# Altium PCB powerhub.PcbDoc (part 1 of 2)
Units mil, origin at the board's own origin, x right, y up, seen from the top; angles counter-clockwise.
Board outline 2155 x 2355 mil, 2 copper layers (Top Layer, Bottom Layer); 40 components, 18 nets, 144 pads, 26 vias.
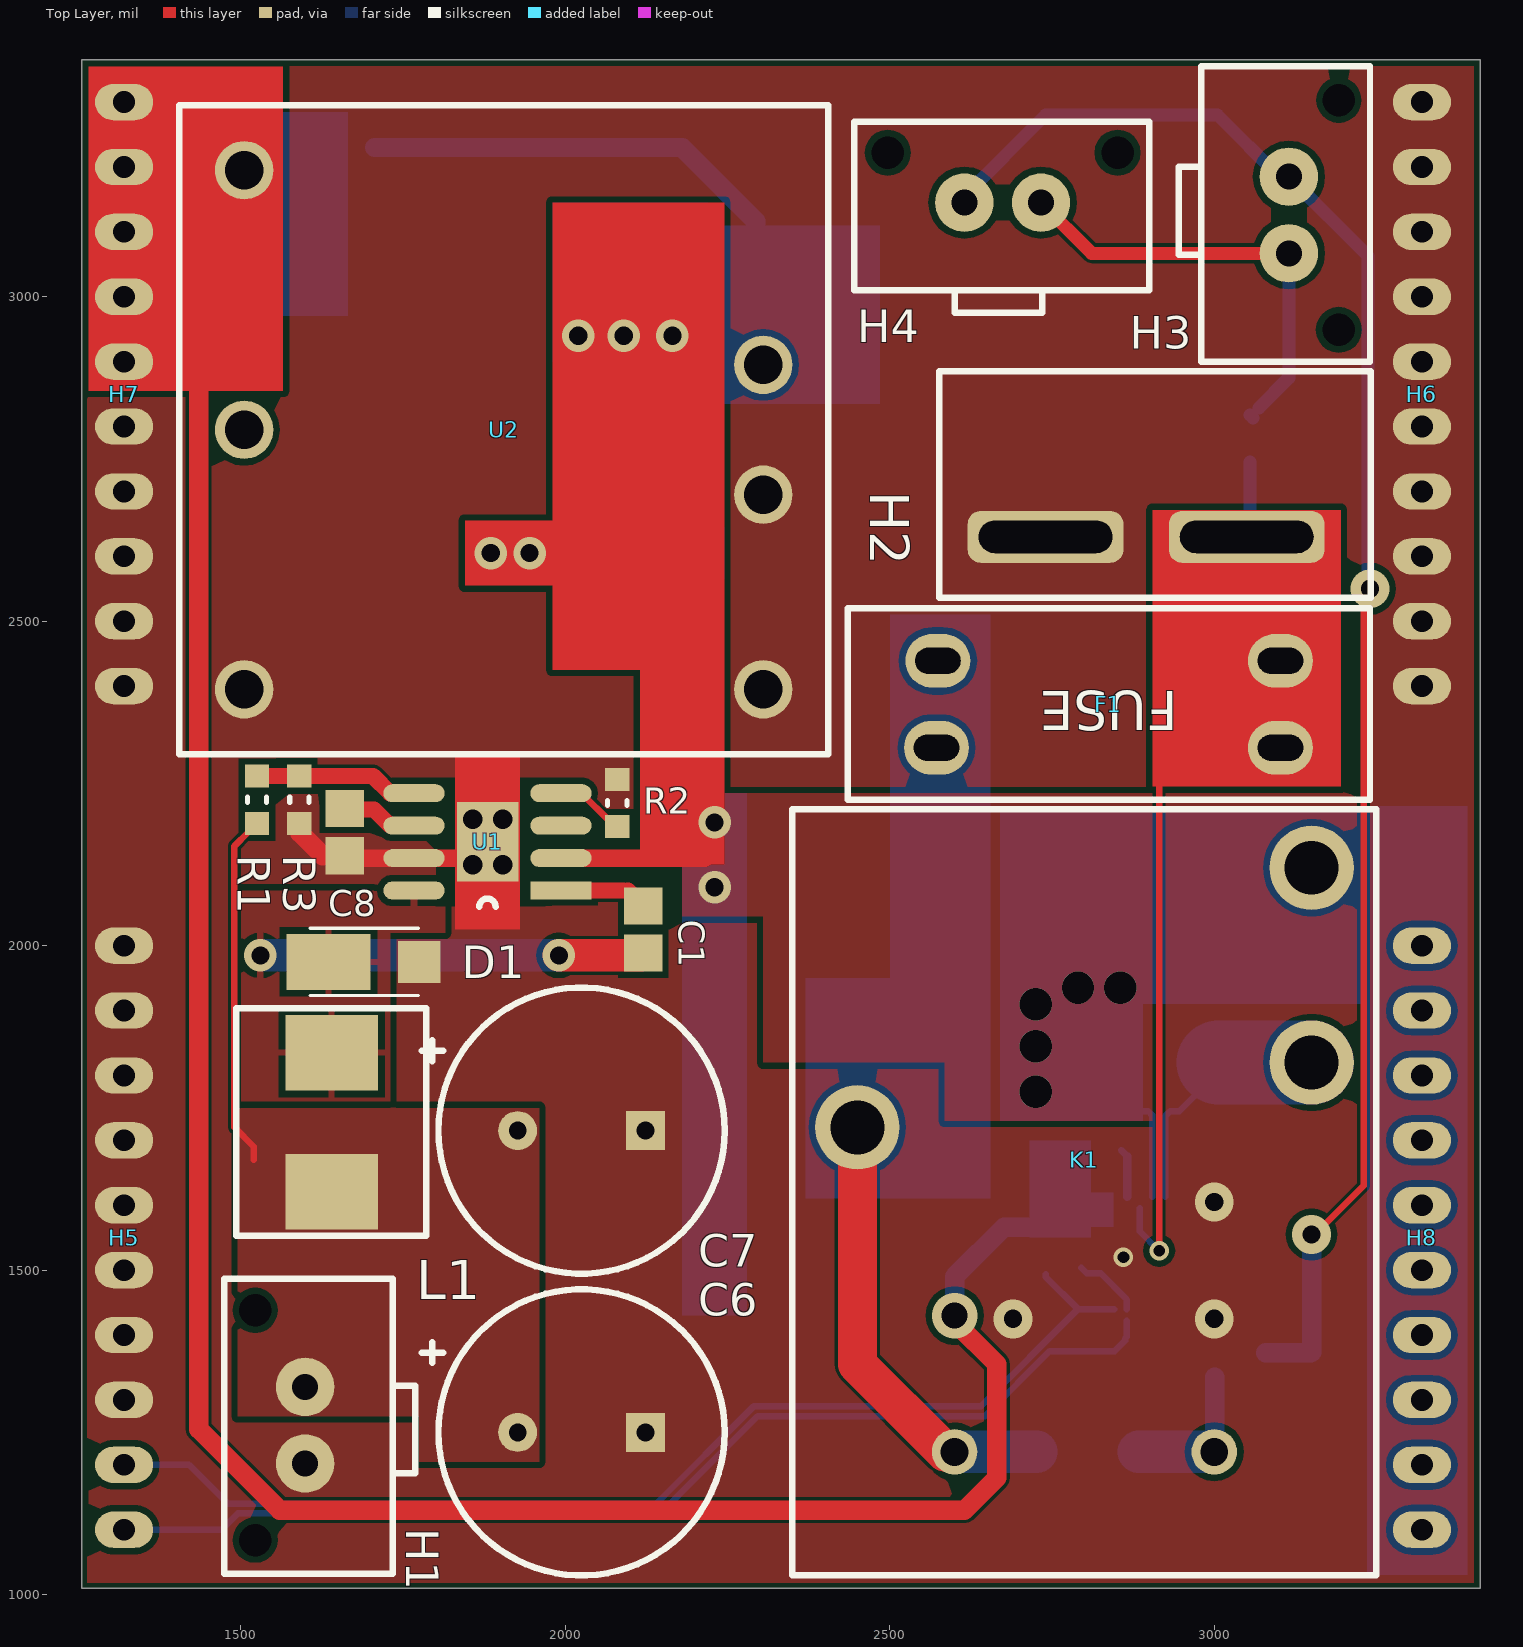
[diagram p0: Top Layer view]
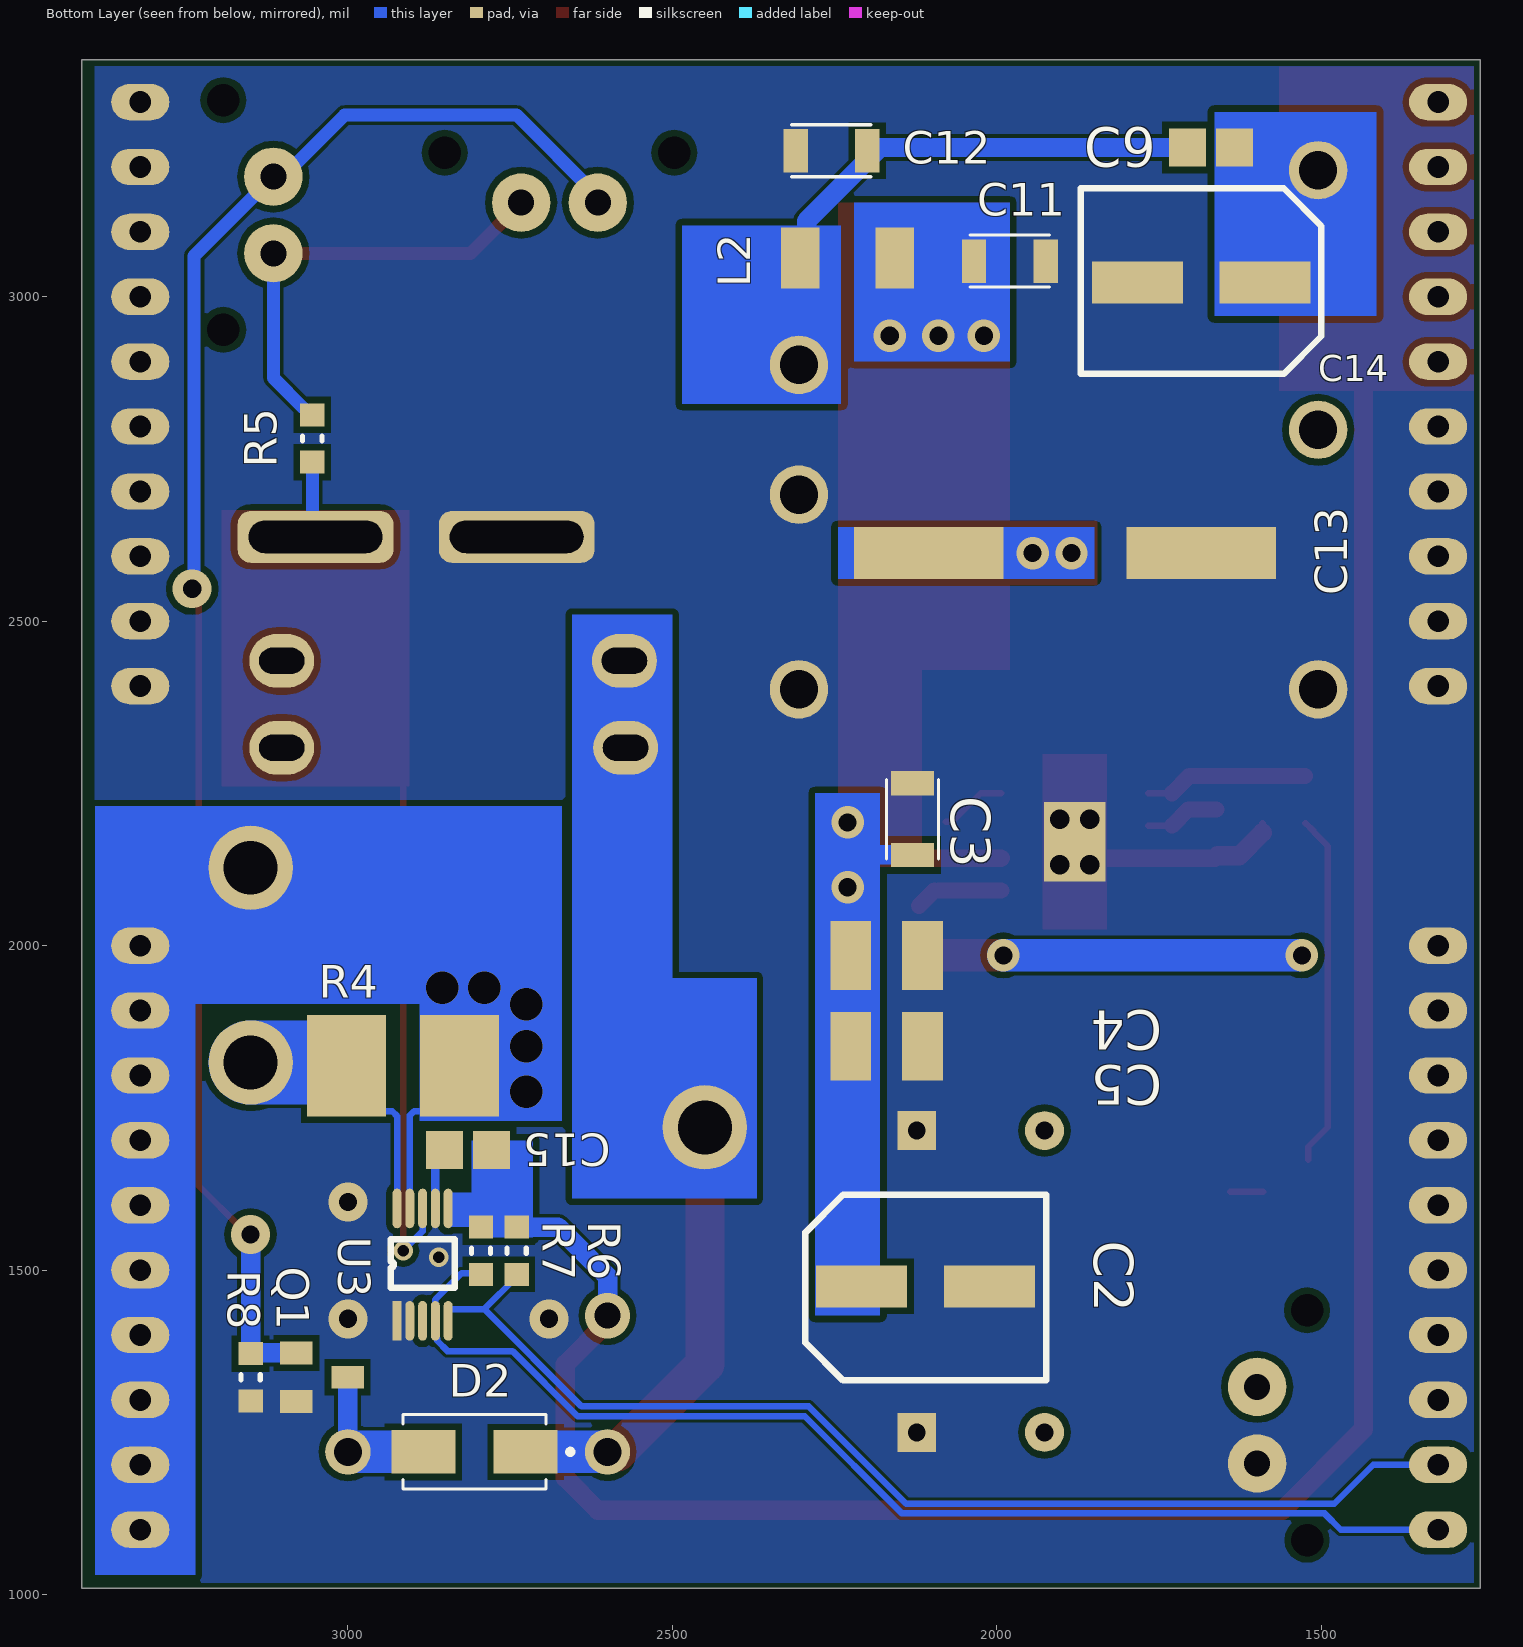
[diagram p1: Bottom Layer view, seen from below]
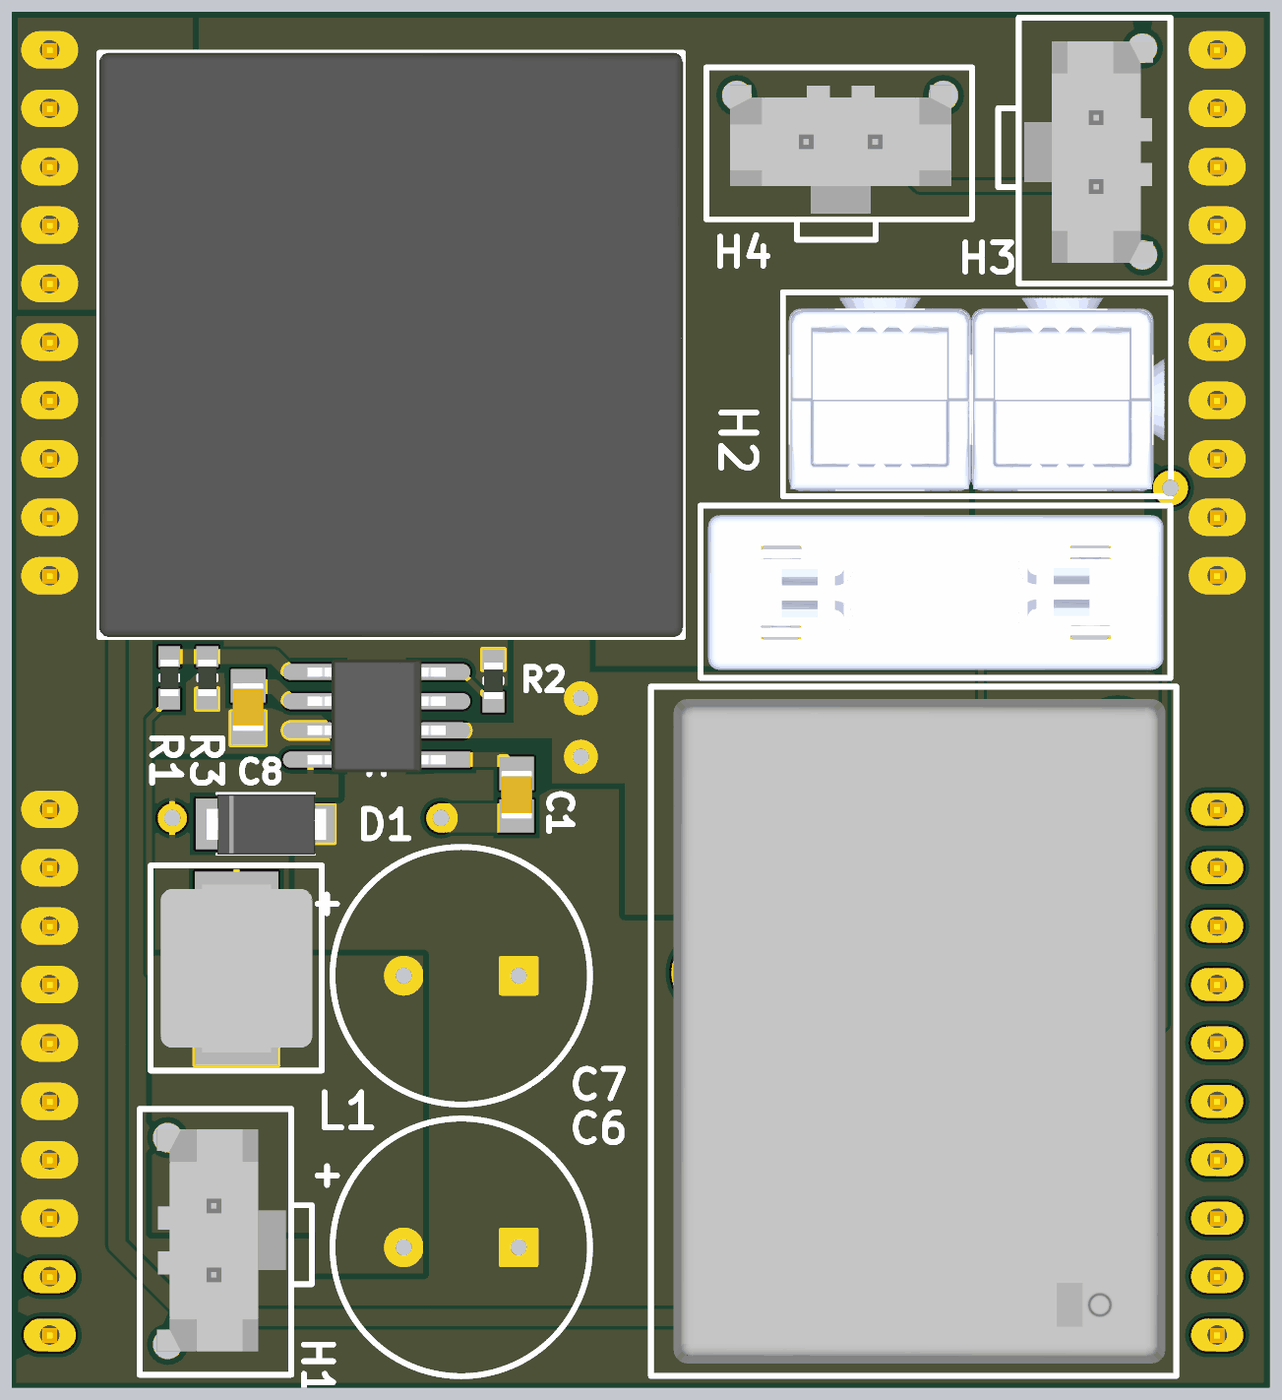
[diagram p2: 3D render of the assembled board from above, using the file's embedded part models]
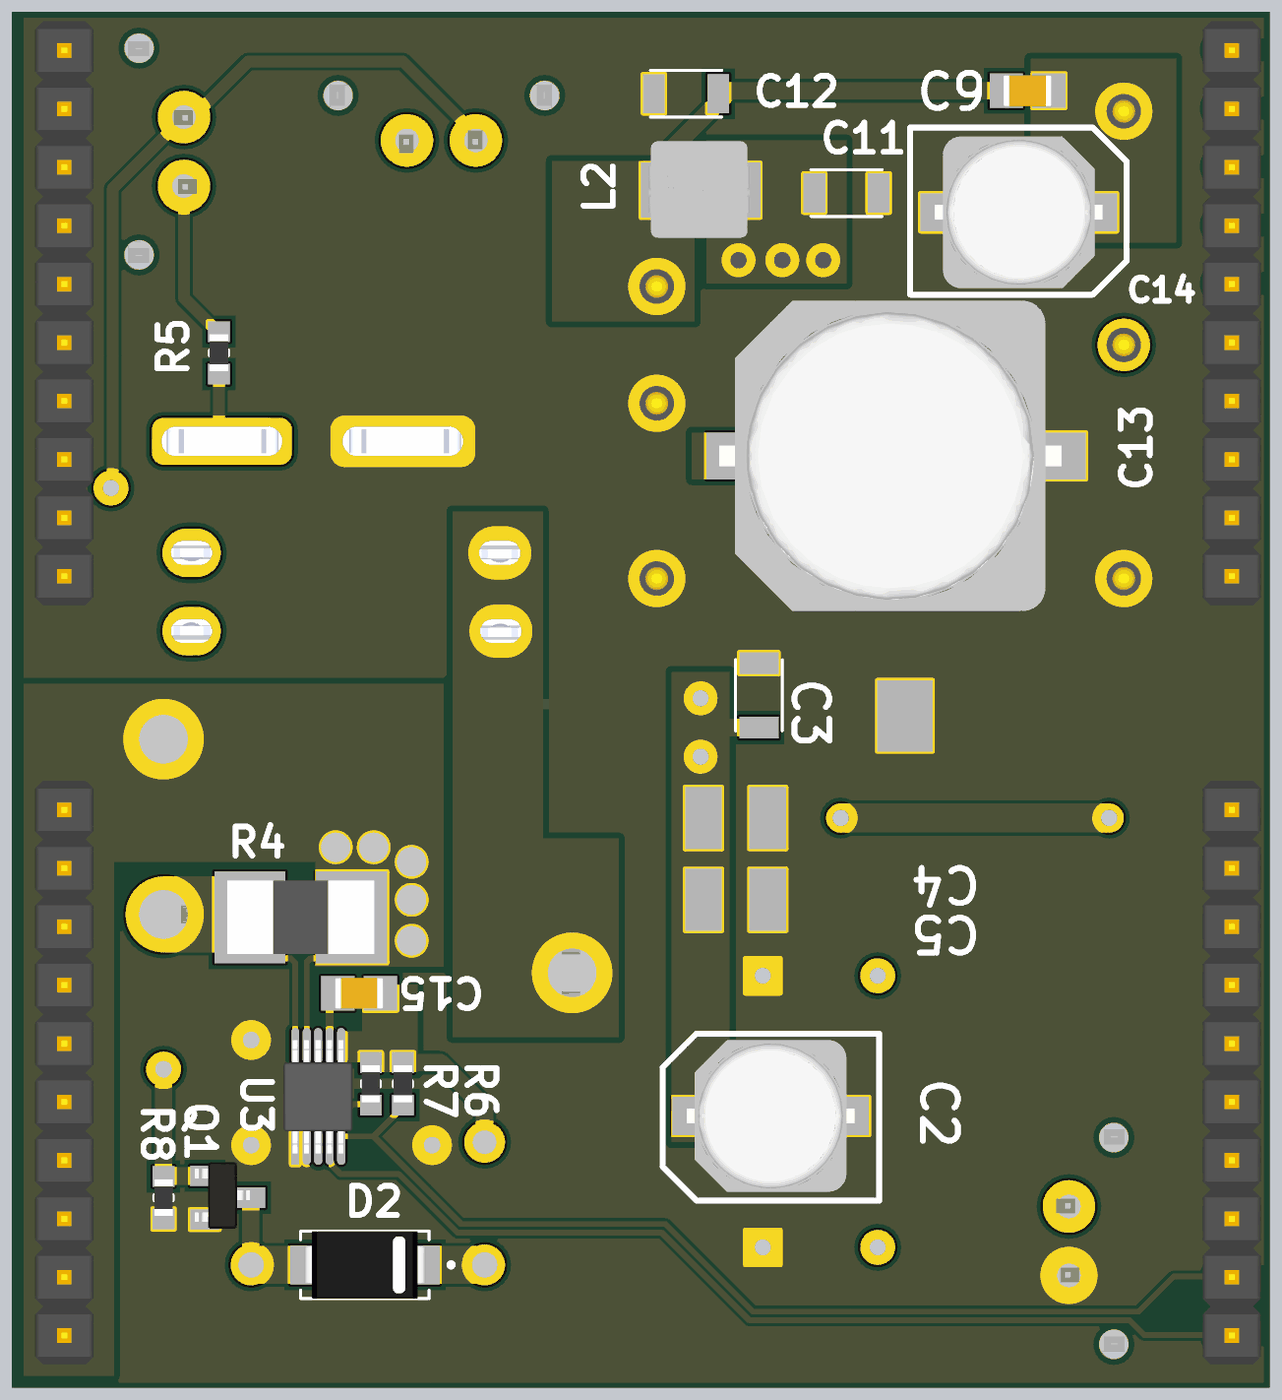
[diagram p3: 3D render of the assembled board from below, using the file's embedded part models]

## Layer stack, top to bottom
Top Solder: solder mask 0.4, Solder Resist, Dk 3.5
Top Layer: signal copper 1.4
Dielectric 1: dielectric 12.6, FR-4, Dk 4.8
Bottom Layer: signal copper 1.4
Bottom Solder: solder mask 0.4, Solder Resist, Dk 3.5

## Board outline
1255,1010 3410,1010 3410,3365 1255,3365

## Design rules (kind name [scope] priority, off if disabled: settings)
BoardOutlineClearance JLC_BoardOutlineClearance_Silk [OnLayer('Top Overlay')  or   OnLayer('Bottom Overlay')] p1: gap=0 ignorepadtopadclearanceinfootprint=FALSE
BoardOutlineClearance JLC_BoardOutlineClearance_Single [All] p2: gap=15.75 ignorepadtopadclearanceinfootprint=FALSE except(0: Arc-SplitContinuation Track-SplitContinuation SMDPad-SplitContinuation THPad-SplitContinuation Via-SplitContinuation Fill-SplitContinuation Poly-SplitContinuation Region-SplitContinuation Text-SplitContinuation; 7.87: Arc-OutlineEdge Track-OutlineEdge SMDPad-OutlineEdge THPad-OutlineEdge Via-OutlineEdge Fill-OutlineEdge Poly-OutlineEdge Region-OutlineEdge Text-OutlineEdge)
BoardOutlineClearance JLC_BoardOutlineClearance_Panel [All] p3: gap=15.75 ignorepadtopadclearanceinfootprint=FALSE except(0: Arc-SplitContinuation Track-SplitContinuation SMDPad-SplitContinuation THPad-SplitContinuation Via-SplitContinuation Fill-SplitContinuation Poly-SplitContinuation Region-SplitContinuation Text-SplitContinuation)
Clearance JLC_Clearance_SB [(HasFootprint('0603 Solder Bridge-Footprint-1'))] p1: gap=5 ignorepadtopadclearanceinfootprint=FALSE except(0: Fill-Hole Poly-Hole Region-Hole Text-Hole; 10: SMDPad-Fill SMDPad-Poly SMDPad-Region THPad-Fill THPad-Poly THPad-Region Via-Fill Via-Poly Via-Region)
Clearance JLC_Clearance_Top [All] p2: gap=5 ignorepadtopadclearanceinfootprint=FALSE except(0: Fill-Hole Poly-Hole Region-Hole Text-Hole; 10: SMDPad-Fill SMDPad-Poly SMDPad-Region THPad-Fill THPad-Poly THPad-Region Via-Fill Via-Poly Via-Region Fill-Fill Fill-Poly Fill-Region Poly-Poly Poly-Region Region-Region)
ComponentClearance JLC_ComponentClearance [All] p1: gap=0 collisioncheckmode=3 verticalgap=0 showdistances=FALSE
ComponentOrientations JLC_ComponentOrientations [All] p1: allowedrotations=32
Height JLC_Height [All] p1: minheight=0 maxheight=99999 prefheight=500
HoleSize JLC_HoleSize [All] p1: absolutevalues=TRUE maxlimit=39370.08 minlimit=12 maxpercent=80.000 minpercent=20.000
HoleToHoleClearance JLC_HoleToHoleClearance [All] p1: gap=12 allowstackedmicrovias=TRUE
MinimumAnnularRing JLC_MinimumAnnularRing [All] p1: minimumring=3
MinimumSolderMaskSliver JLC_MinimumSolderMaskSliver [All] p1: minsoldermaskwidth=0
PolygonConnect PolygonHighPower [(InNet('NetC1_1') OR InNet('GND') OR InNet('VBAT') OR InNet('19V'))] p1: connectstyle=Direct reliefconductorwidth=10 reliefentries=4 polygonreliefangle="90 Angle" airgapwidth=10
PolygonConnect [All] p2: connectstyle=Relief reliefconductorwidth=10 reliefentries=4 polygonreliefangle="90 Angle" airgapwidth=10
RoutingVias JLC_RoutingVias [All] p1: holewidth=15 width=25 viastyle="Through Hole" minholewidth=12 minwidth=24 maxholewidth=248 maxwidth=500
SilkToSilkClearance JLC_SilkToSilkClearance [All] p1: silktosilkclearance=0
SilkToSolderMaskClearance JLC_SilkToSolderMaskClearance [IsPad] p1: minsilkscreentomaskgap=0 clearancetoexposedcopper=TRUE
SolderMaskExpansion [All] p1: expansion=4 istentingtop=FALSE
Width JLC_Width [All] p1: maxlimit=500 minlimit=5 preferedwidth=10
23 further rules are at their usual default settings.

## Classes and differential pairs
component class main: C1 C2 C3 C4 C5 C6 C7 C8 C9 C11 C12 C13 C14 C15 D1 D2 F1 H1 H2 H3 H4 K1 L1 L2 Q1 R1 R2 R3 R4 R5 R6 R7 R8 U2 U3

## Components (designator, comment, footprint, x,y, rotation, side; value= is the part's Value field where it differs from the comment)
C1 "value" "CAP 0805 L" 2120,2025 r90 top
C2 "Cap Pol1" CAP_ALEY_D8 2110,1475 r270 bottom
C3 "value" 1206_CAP 2130,2195 r90 bottom
C4 "value" 1210 2170,1985 r0 bottom value=2.2uF
C5 "value" 1210 2170,1845 r0 bottom value=2.2uF
C6 "Cap Pol1" CAP_THRU 2025,1250 r90 top
C7 "Cap Pol1" CAP_THRU 2025,1715 r90 top
C8 "value" "CAP 0805 L" 1660,2175 r90 top value=22nF
C9 "value" "CAP 0805 L" 1670,3230 r0 bottom value=1nF
C11 "value" 1206_CAP 1980,3055 r0 bottom value=4.7uF
C12 "value" 1206_CAP 2254.88,3225 r180 bottom value=4.7uF
C13 "Cap Pol1" CAP_ALELY_H13 1905,2605 r270 bottom
C14 "Cap Pol1" CAP_ALEY_D8 1685,3022.01 r90 bottom
C15 "0.1uF" "CAP 0805 L" 2815,1685 r180 bottom
D1 "D Schottky" DO-221BC 1690,1975 r0 top
D2 "Diode" DIOM5226X240N 2805,1220 r0 bottom
F1 "30A Fast Blow" FUSE_HOLDER_30A 2835,2360 r180 top
H1 "TERM_2P" MOLEX_3MM_2 1598.99,1202 r270 top
H2 "BAT" PP45_VERT 2740,2630 r0 top
H3 "TERM_2P" MOLEX_3MM_2 3115,3185 r90 top
H4 "TERM_2P" MOLEX_3MM_2 2615,3145 r180 top
H5 "TERM_10P" HEADER_10P 1320,1100 r90 top
H6 "TERM_10P" HEADER_10P 3320,2400 r90 top
H7 "TERM_10P" HEADER_10P 1320,2400 r90 top
H8 "TERM_10P" HEADER_10P 3320,1100 r90 top
K1 "Relay-SPST" RELAY_30A 2800,1220 r0 top
L1 "Inductor Iron" IND_SMT 1640,1727.75 r270 top
L2 "Inductor Iron" IND_SMT_S 2230,3060 r0 bottom value=2.2uH
Q1 "MOSFET-N" SOT23-3 3040,1335 r270 bottom
R1 "Res1" "RES 0603 L" 1525,2225 r270 top
R2 "Res1" "RES 0603 L" 2080,2220 r270 top value=49.9K
R3 "Res1" "RES 0603 L" 1590,2225 r90 top
R4 "Rsense" RSENSE 2915,1815 r0 bottom
R5 "470K" "RES 0603 L" 3055,2781.42 r270 bottom
R6 "Res1" "RES 0603 L" 2740,1530 r270 bottom value=4.7K
R7 "Res1" "RES 0603 L" 2795,1530 r90 bottom value=4.7K
R8 "100K" "RES 0603 L" 3150,1335 r90 bottom
U1 "LMR14050" HSOIC-8 1993.19,2085 r180 top
U2 "DC-DC_3v3" DC_3V3 2305,2395 r180 top
U3 "INA233" VSSOP-10 2924.37,1421.77 r90 bottom

## Footprints (in the part's own frame and the unit in brackets; to place one, negate y for a bottom-side part, rotate by r counter-clockwise, add the part's x,y. Pads: shape width x height; smd on the part's side, far side on the other; paste and mask are expansions set on the pad)
1206_CAP [mm] "RESC3115X65N"
  rect 0.95x1.7 smd: 1(-1.4,0) 2(1.4,0)
  silkscreen extent -1.55,-1.02 1.55,1.02
1210 [mm]
  rect 1.6x2.7 smd: 1(-1.4,0) 2(1.4,0)
"CAP 0805 L" [mm] "Chip Capacitor, 2-Leads, Body 2.00x1.25mm, IPC Low Density"
  rect 1.45x1.5 smd: 1(-0.925,0) 2(0.925,0)
  body extent -1.05,-0.67 1.05,0.67, height 1.35
CAP_ALELY_H13 [mil]
  rect 80x230 smd: 1(0,-200) 2(0,220)
  body extent -266,-293 266,293, height 532
CAP_ALEY_D8 [mil]
  rect 65x140 smd: 1(0,-98.43) 2(0,98.43)
  silkscreen extent -141,-185 145,186, body extent -130,-144 130,144, height 303
CAP_THRU [mil]
  round 60 hole 27.56: 1(0,98.43)
  rect 60x60 hole 27.56: 2(0,-98.43)
  silkscreen extent -220,-220 220,246, body extent -197,-197 197,197, height 433
DC_3V3 [mil]
  round 90 hole 59: 1(0,0) 2(0,-300) 3(0,-500) 4(800,-800) 5(800,-400) 6(800,0)
  silkscreen extent -100,-900 900,100, body extent -100,-900 900,100, height 466
DIOM5226X240N [mm]
  rect 2.5x1.7 smd: 1(2,0) 2(-2,0)
  silkscreen extent -3.85,-1.46 2.8,1.46, body extent -2.64,-1.46 2.64,1.46, height 2.41
DO-221BC [mil]
  rect 65x65 smd: 1(85,0)
  rect 130x86.61 smd: 2(-55,0)
  silkscreen extent -84,-52 84,52, body extent -101,-52 104,50, height 39
FUSE_HOLDER_30A [mil]
  oval 100x83 hole 40 slot 70 at 0 deg: 1(-267,-79) 1(-267,55) 2(261,-79) 2(263,55)
  silkscreen extent -405,-160 400,135, body extent -393,-144 387,121, height 309
HEADER_10P [mil] "100mil 10P header"
  oval 56x89.6 / inner round 60 / far side oval 56x89.6 hole 33.46: 1(0,0) 2(100,0) 3(200,0) 4(300,0) 5(400,0) 6(500,0) 7(600,0) 8(700,0) 9(800,0) 10(900,0)
  body extent -51,-50 949,50, height 107
HSOIC-8 [mm]
  rect 2.4x0.7 smd: 1(0,0)
  oval 2.4x0.7 smd: 2(0,-1.27) 3(0,-2.54) 4(0,-3.81) 5(5.75,-3.81) 6(5.75,-2.54) 7(5.75,-1.27) 8(5.75,0)
  rect 2.4x3.1 smd: 7(2.87,-1.905)
  rect 2.4x3.1 smd far side: 7(2.875,-1.905)
  silkscreen extent 2.56,0.32 3.19,0.64, body extent -0.12,-4.35 5.88,0.55, height 1.57
IND_SMT [mil]
  rect 116.5x143 smd: 1(-107.25,0) 2(107.25,0)
  silkscreen extent -176,-147 175,146, body extent -144,-130 144,130, height 181
IND_SMT_S [mm]
  rect 1.5x2.388 smd: 1(-1.85,0) 2(1.85,0)
  body extent -2.14,-2.13 2.26,2.07, height 1.91
MOLEX_3MM_2 [mil]
  round 40 hole 50: 0(-236,-77) 0(118,-77)
  round 90 hole 40: 1(0,0) 2(-118,0)
  silkscreen extent -285,-125 170,170, body extent -250,-95 130,126, height 395
PP45_VERT [mil] "PowerPole45 vertical"
  rrect50% 240x80 hole 50 slot 206 at 0 deg: 1(0,0) 2(310,0)
  silkscreen extent -164,-94 501,255, body extent -154,-85 490,246, height 998
RELAY_30A [mil]
  round 130 hole 83: 1(-350,500) 2(350,600) 5(350,900)
  round 70 hole 43: 3(-200,0) 4(200,0)
  silkscreen extent -450,-190 450,990, body extent -411,-169 431,969, height 600
"RES 0603 L" [mm] "Chip Resistor, 2-Leads, Body 1.60x0.80mm, IPC Low Density"
  rect 0.9x0.95 smd: 1(-0.925,0) 2(0.925,0)
  silkscreen extent -0.1,-0.38 0.1,0.38, body extent -0.8,-0.4 0.8,0.4, height 0.45
RSENSE [mil] "RESC3115X65N"
  rect 122x157 smd: 1(-87,0) 2(87,0)
  body extent -126,-63 126,63, height 35
SOT23-3 [mm]
  rect 0.889x1.27 smd: 1(0,1) 2(-0.95,-1) 3(0.95,-1)
  body extent -1.55,-1.43 1.35,0.97, height 2.11
VSSOP-10 [mm]
  rect 1.55x0.35 smd: 1(0,0)
  oval 1.55x0.35 smd: 2(0,-0.5) 3(0,-1) 4(0,-1.5) 5(0,-2) 6(4.4,-2) 7(4.4,-1.5) 8(4.4,-1) 9(4.4,-0.5) 10(4.4,0)
  silkscreen extent 1.3,-2.25 3.2,0.25, body extent -0.28,-2.49 4.65,0.51, height 1.04

## Part data
C1: library part "CAP 0805", "CAP 0805", Capacitance=0.1uF, Case/Package=0805, Case Code (Metric)=2012, Manufacturer=Yageo, Manufacturer Part Number=AC0805KRX7R8BB104, Max Operating Temperature=125°C, Min Operating Temperature=-55°C, Ratings=AEC-Q200, Supplier Part Number 1=311-3169-1-ND, Tolerance=10%, Voltage=50V, Voltage Rating=25V, Case Code (Imperial)=0805, ComponentLink1Description=http://www.yageo.com/NewPortal/_en/search/productDocs.jsp?YageoPartNumber=AC0805KRX7R8BB104&src-supplier=Digi-Key, ComponentLink1URL=http://www.yageo.com/NewPortal/_en/search/productDocs.jsp?YageoPartNumber=AC0805KRX7R8BB104&src-supplier=Digi-Key, Mount="Surface Mount", Packaging="Tape and Reel", Pricing 1="1=0.23000, 10=0.15800, 100=0.08000, 500=0.05470, 1000=0.04840 (USD)", RoHS=No, Stock 1=13795, Supplier 1=Digi-Key
C2: "Polarized Capacitor (Radial)", Capacitance=100uF, Case/Package=Radial, ESR (Equivalent Series Resistance)=340mR, Leakage Current=50uA, Manufacturer=Panasonic, Manufacturer Part Number=EEE-FTH101XAP, Max Operating Temperature=105°C, Min Operating Temperature=-55°C, Package Quantity=1, Ripple Current=350mA, Supplier Part Number 1=PCE5024CT-ND, Tolerance=20%, Voltage=50V, ComponentLink1Description=https://datasheet.ciiva.com/11780/0900766b80f4973e-11780053.pdf?src-supplier=RSComponents, ComponentLink1URL=https://datasheet.ciiva.com/11780/0900766b80f4973e-11780053.pdf?src-supplier=RSComponents, ComponentLink2Description=https://datasheet.ciiva.com/28691/1244238-28691192.pdf?src-supplier=Element14, ComponentLink2URL=https://datasheet.ciiva.com/28691/1244238-28691192.pdf?src-supplier=Element14, ComponentLink3Description=https://datasheet.ciiva.com/6134/1790597-6134202.pdf?src-supplier=Farnell, ComponentLink3URL=https://datasheet.ciiva.com/6134/1790597-6134202.pdf?src-supplier=Farnell, ComponentLink4Description=https://datasheet.ciiva.com/46388/1790597-46388586.pdf?src-supplier=Element14, ComponentLink4URL=https://datasheet.ciiva.com/46388/1790597-46388586.pdf?src-supplier=Element14, ComponentLink5Description=https://datasheet.ciiva.com/10331/aba0000ce135-10331102.pdf?src-supplier=Avnet, ComponentLink5URL=https://datasheet.ciiva.com/10331/aba0000ce135-10331102.pdf?src-supplier=Avnet, ComponentLink6Description=https://datasheet.ciiva.com/17534/aba0000ce135-17534542.pdf?src-supplier=Avnet+Europe, ComponentLink6URL=https://datasheet.ciiva.com/17534/aba0000ce135-17534542.pdf?src-supplier=Avnet+Europe, ComponentLink7Description=https://datasheet.ciiva.com/43458/1790597-43458702.pdf?src-supplier=Farnell, ComponentLink7URL=https://datasheet.ciiva.com/43458/1790597-43458702.pdf?src-supplier=Farnell, ComponentLink8Description=https://datasheet.ciiva.com/46396/1790597-46396046.pdf?src-supplier=Element14, ComponentLink8URL=https://datasheet.ciiva.com/46396/1790597-46396046.pdf?src-supplier=Element14, ComponentLink9Description=https://datasheet.ciiva.com/11679/aba0000ce135-11679935.pdf?src-supplier=Avnet, ComponentLink9URL=https://datasheet.ciiva.com/11679/aba0000ce135-11679935.pdf?src-supplier=Avnet, ComponentLink10Description=https://datasheet.ciiva.com/48523/smd-ft-eng-tds-48523270.pdf?src-supplier=Distrelec, ComponentLink10URL=https://datasheet.ciiva.com/48523/smd-ft-eng-tds-48523270.pdf?src-supplier=Distrelec, ComponentLink11Description=https://datasheet.ciiva.com/24022/aba0000ce135-31031-24022620.pdf?src-supplier=Mouser, ComponentLink11URL=https://datasheet.ciiva.com/24022/aba0000ce135-31031-24022620.pdf?src-supplier=Mouser, ComponentLink12Description=https://datasheet.ciiva.com/28691/1244238-28691196.pdf?src-supplier=Element14, ComponentLink12URL=https://datasheet.ciiva.com/28691/1244238-28691196.pdf?src-supplier=Element14, ComponentLink13Description=https://datasheet.ciiva.com/16226/aba0000ce135-16226142.pdf?src-supplier=Future+Electronics, ComponentLink13URL=https://datasheet.ciiva.com/16226/aba0000ce135-16226142.pdf?src-supplier=Future+Electronics, Contact Plating=Tin, Diameter=6.3mm, Height=7.7mm, Height - Seated (Max)=0.315inch, Lead Diameter=0.65mm, Lead Pitch=1.8mm, Length=7.7mm, Life (Hours)=2000Hour, Mount="Surface Mount,PCB", Number of Pins=2, Packaging="Tape and Reel", Pricing 1="1=0.76000, 10=0.56300, 100=0.38580 (USD)", Radiation Hardening=No, REACH SVHC="No SVHC", Ripple Current (AC)=350mA, RoHS=Yes, Stock 1=39470, Supplier 1=Digi-Key, Termination=SMD/SMT, Voltage Rating=50V, Voltage Rating (DC)=50V
C3: library part "CAP 0805", "CAP 0805", Capacitance=0.1uF, Case/Package=1206, Case Code (Metric)=3216, Dielectric=C0G, Manufacturer=TDK, Manufacturer Part Number=CGA5L2C0G1H104J160AA, Max Operating Temperature=125°C, Min Operating Temperature=-55°C, Package Quantity=1, Ratings=AEC-Q200, Supplier Part Number 1=445-6984-1-ND, Tolerance=5%, Voltage Rating=50V, Case Code (Imperial)=1206, ComponentLink1Description=https://datasheet.ciiva.com/24216/cga5l2c0g1h104j160aa-266057-24216462.pdf?src-supplier=Mouser, ComponentLink1URL=https://datasheet.ciiva.com/24216/cga5l2c0g1h104j160aa-266057-24216462.pdf?src-supplier=Mouser, ComponentLink2Description=https://datasheet.ciiva.com/8079/1851769-8079783.pdf?src-supplier=Element14, ComponentLink2URL=https://datasheet.ciiva.com/8079/1851769-8079783.pdf?src-supplier=Element14, ComponentLink3Description=https://datasheet.ciiva.com/16428/mlcc-automotive-general-en-16428522.pdf?src-supplier=Future+Electronics, ComponentLink3URL=https://datasheet.ciiva.com/16428/mlcc-automotive-general-en-16428522.pdf?src-supplier=Future+Electronics, ComponentLink4Description=https://datasheet.ciiva.com/22725/1735392-22725659.pdf?src-supplier=Element14, ComponentLink4URL=https://datasheet.ciiva.com/22725/1735392-22725659.pdf?src-supplier=Element14, ComponentLink5Description=https://datasheet.ciiva.com/23803/1936565-23803102.pdf?src-supplier=Newark, ComponentLink5URL=https://datasheet.ciiva.com/23803/1936565-23803102.pdf?src-supplier=Newark, ComponentLink6Description=https://datasheet.ciiva.com/28620/1735392-28620703.pdf?src-supplier=Element14, ComponentLink6URL=https://datasheet.ciiva.com/28620/1735392-28620703.pdf?src-supplier=Element14, Composition=Ceramic, Depth=1.6mm, Height=1.6mm, Lead Free="Lead Free", Length=3.2mm, Mount="Surface Mount", Packaging="Tape and Reel", Pricing 1="1=0.56000, 10=0.39600, 100=0.26080, 500=0.19320, 1000=0.16422 (USD)", REACH SVHC="No SVHC", RoHS=Yes, Stock 1=311401, Supplier 1=Digi-Key, Termination=SMD/SMT, Thickness=0.075inch, Voltage Rating (DC)=50V, Weight=0.000571oz, Width=0.063inch
C4 C5: library part "CAP 0805", "CAP 0805", Capacitance=2.2uF, Case/Package=1210, Case Code (Metric)=3225, Dielectric=X7R, Dielectric Material=Ceramic, Manufacturer=Yageo, Manufacturer Part Number=AC0805KRX7R8BB223, Max Operating Temperature=125°C, Min Operating Temperature=-55°C, Ratings=AEC-Q200, Supplier Part Number 1=311-3170-1-ND, Tolerance=10%, Voltage Rating=100V, Case Code (Imperial)=1210, ComponentLink1Description=http://www.farnell.com/datasheets/2746201.pdf?src-supplier=Farnell, ComponentLink1URL=http://www.farnell.com/datasheets/2746201.pdf?src-supplier=Farnell, ComponentLink2Description=http://www.farnell.com/datasheets/2746201.pdf?src-supplier=Element14, ComponentLink2URL=http://www.farnell.com/datasheets/2746201.pdf?src-supplier=Element14, ComponentLink3Description=https://api.kemet.com/component-edge/download/datasheet/C1210C225K1RACAUTO.pdf?src-supplier=Digi-Key, ComponentLink3URL=https://api.kemet.com/component-edge/download/datasheet/C1210C225K1RACAUTO.pdf?src-supplier=Digi-Key, ComponentLink4Description=http://www.farnell.com/datasheets/2746201.pdf?src-supplier=Newark, ComponentLink4URL=http://www.farnell.com/datasheets/2746201.pdf?src-supplier=Newark, Length=0.126inch, Mount="Surface Mount", Packaging="Cut Tape", Pricing 1="1=0.24000, 10=0.16300, 100=0.08260, 500=0.05654, 1000=0.05001 (USD)", Pricing 2="1=0.67000, 10=0.49700, 100=0.34050, 500=0.26958, 1000=0.22702 (USD)", REACH SVHC="No SVHC", RoHS=No, Stock 1=1274, Stock 2=10999, Supplier 1=Digi-Key, Supplier 2=Digi-Key, Supplier Part Number 2=399-13375-1-ND, Voltage Rating (DC)=100V, Width=0.098inch
C6 C7: "Polarized Capacitor (Radial)", Capacitance=100uF, Case/Package=Radial, ESR (Equivalent Series Resistance)=28mR, Manufacturer=Panasonic, Manufacturer Part Number=EEH-AZF1H101, Max Operating Temperature=150°C, Min Operating Temperature=-55°C, Ratings=AEC-Q200, Supplier Part Number 1=P123935-ND, Tolerance=20%, Voltage Rating=50V, ComponentLink1Description=https://industrial.panasonic.com/cdbs/www-data/pdf/RDD0000/RDD0000C1240.pdf?src-supplier=Digi-Key, ComponentLink1URL=https://industrial.panasonic.com/cdbs/www-data/pdf/RDD0000/RDD0000C1240.pdf?src-supplier=Digi-Key, Composition=Hybrid, Life (Hours)=1000Hour, Mount="Through Hole", Packaging=Bulk, Pricing 1="1=1.86000, 10=1.47200, 100=1.10360, 500=0.83386, 1000=0.73575, 2500=0.68670, 5000=0.66708 (USD)", RoHS=No, Stock 1=1779, Supplier 1=Digi-Key
C8: library part "CAP 0805", "CAP 0805", Manufacturer=Yageo, Manufacturer Part Number=AC0805KRX7R8BB223, Supplier Part Number 1=311-3170-1-ND, Voltage=25V, Pricing 1="1=0.24000, 10=0.16300, 100=0.08260, 500=0.05654, 1000=0.05001 (USD)", RoHS=No, Stock 1=1274, Supplier 1=Digi-Key
C9: library part "CAP 0805", "CAP 0805", Capacitance=1nF, Case/Package=0805, Case Code (Metric)=2012, Dielectric=X7R, Dielectric Material=Ceramic, Manufacturer=KEMET, Manufacturer Part Number=C0805C102K5RACAUTO, Max Operating Temperature=125°C, Min Operating Temperature=-55°C, Package Quantity=1, Ratings=AEC-Q200, Supplier Part Number 1=399-6921-1-ND, Tolerance=10%, Voltage=2kV, Voltage Rating=50V, Case Code (Imperial)=0805, ComponentLink1Description=http://components.arrow.com/part/dataview/48355954S9860408N7429?src-supplier=Arrow, ComponentLink1URL=http://components.arrow.com/part/dataview/48355954S9860408N7429?src-supplier=Arrow, ComponentLink2Description=http://www.farnell.com/datasheets/2740239.pdf?src-supplier=Farnell, ComponentLink2URL=http://www.farnell.com/datasheets/2740239.pdf?src-supplier=Farnell, ComponentLink3Description=http://www.mouser.com/ds/2/212/KEM_C1023_X7R_AUTO_SMD-1093309.pdf?src-supplier=Mouser, ComponentLink3URL=http://www.mouser.com/ds/2/212/KEM_C1023_X7R_AUTO_SMD-1093309.pdf?src-supplier=Mouser, ComponentLink4Description=http://components.arrow.com/part/dataview/0323_00324849?src-supplier=Arrow+Europe, ComponentLink4URL=http://components.arrow.com/part/dataview/0323_00324849?src-supplier=Arrow+Europe, ComponentLink5Description=https://api.kemet.com/component-edge/download/datasheet/C0805C102K5RACAUTO.pdf?src-supplier=Digi-Key, ComponentLink5URL=https://api.kemet.com/component-edge/download/datasheet/C0805C102K5RACAUTO.pdf?src-supplier=Digi-Key, ComponentLink6Description=http://www.farnell.com/datasheets/1693454.pdf?src-supplier=Element14, ComponentLink6URL=http://www.farnell.com/datasheets/1693454.pdf?src-supplier=Element14, ComponentLink7Description=http://capacitoredge.kemet.com/capedge2/DataSheet?pn=C0805C102K5RACAUTO&src-supplier=Avnet, ComponentLink7URL=http://capacitoredge.kemet.com/capedge2/DataSheet?pn=C0805C102K5RACAUTO&src-supplier=Avnet, ComponentLink8Description=http://capacitoredge.kemet.com/capedge2/DataSheet?pn=C0805C102K5RACAUTO&src-supplier=Avnet+Europe, ComponentLink8URL=http://capacitoredge.kemet.com/capedge2/DataSheet?pn=C0805C102K5RACAUTO&src-supplier=Avnet+Europe, ComponentLink9Description=http://capacitoredge.kemet.com/capedge2/DataSheet/Datasheet-C0805C102K5RACAUTO.pdf?pn=C0805C102K5RACAUTO&src-supplier=Avnet+Asia, ComponentLink9URL=http://capacitoredge.kemet.com/capedge2/DataSheet/Datasheet-C0805C102K5RACAUTO.pdf?pn=C0805C102K5RACAUTO&src-supplier=Avnet+Asia, ComponentLink10Description=https://www.verical.com/server-webapp/html/getDatasheet?partID=385641&src-supplier=Verical, ComponentLink10URL=https://www.verical.com/server-webapp/html/getDatasheet?partID=385641&src-supplier=Verical, Contact Plating=Tin,Matte, Depth=1.25mm, Height=0.78mm, Length=2mm, Mount="Surface Mount", Packaging="Tape and Reel", Pricing 1="1=0.18000, 10=0.12200, 100=0.06200, 500=0.04240, 1000=0.03750 (USD)", Radiation Hardening=No, REACH SVHC="No SVHC", RoHS=Yes, Stock 1=6163, Supplier 1=Digi-Key, Termination=SMD/SMT, Thickness=0.035inch, Voltage Rating (DC)=50V, Width=0.049inch
C11 C12: library part "CAP 0805", "CAP 0805", Manufacturer=KEMET, Manufacturer Part Number=C1206C475K5RACAUTO, Supplier Part Number 1=399-C1206C475K5RACAUTOCT-ND, Voltage=50V, ComponentLink1Description=http://www.farnell.com/datasheets/2818560.pdf?src-supplier=Newark, ComponentLink1URL=http://www.farnell.com/datasheets/2818560.pdf?src-supplier=Newark, Pricing 1="1=0.47000, 10=0.32900, 100=0.19740, 500=0.14808, 1000=0.12505 (USD)", Stock 1=14194, Supplier 1=Digi-Key
  C12: RoHS=No
C13: "Polarized Capacitor (Radial)", Capacitance=330uF, Case/Package=Radial, Dielectric Material=Aluminium, ESR (Equivalent Series Resistance)=120mR, Leakage Current=3uA, Manufacturer=Panasonic, Manufacturer Part Number=EEVFK1H331Q, Max Operating Temperature=105°C, Min Operating Temperature=-55°C, Package Quantity=1, Ripple Current=900mA, Supplier Part Number 1=PCE3475CT-ND, Tolerance=20%, Voltage=50V, ComponentLink2Description=https://datasheet.ciiva.com/19479/2014086-19479334.pdf?src-supplier=Jameco, ComponentLink2URL=https://datasheet.ciiva.com/19479/2014086-19479334.pdf?src-supplier=Jameco, ComponentLink3Description=https://datasheet.ciiva.com/11780/0900766b80e4e8b0-11780888.pdf?src-supplier=RSComponents, ComponentLink3URL=https://datasheet.ciiva.com/11780/0900766b80e4e8b0-11780888.pdf?src-supplier=RSComponents, ComponentLink4Description=https://datasheet.ciiva.com/29313/443497-da-01-en-smd-elko-vfk-h13-330-uf-50v-29313613.pdf?src-supplier=Conrad, ComponentLink4URL=https://datasheet.ciiva.com/29313/443497-da-01-en-smd-elko-vfk-h13-330-uf-50v-29313613.pdf?src-supplier=Conrad, ComponentLink5Description=https://datasheet.ciiva.com/2984/aba0000ce120-2984084.pdf?src-supplier=Avnet, ComponentLink5URL=https://datasheet.ciiva.com/2984/aba0000ce120-2984084.pdf?src-supplier=Avnet, ComponentLink6Description=https://datasheet.ciiva.com/6019/1676921-6019142.pdf?src-supplier=Farnell, ComponentLink6URL=https://datasheet.ciiva.com/6019/1676921-6019142.pdf?src-supplier=Farnell, ComponentLink7Description=https://datasheet.ciiva.com/14607/70258115-14607832.pdf?src-supplier=Allied+Electronics, ComponentLink7URL=https://datasheet.ciiva.com/14607/70258115-14607832.pdf?src-supplier=Allied+Electronics, ComponentLink8Description=https://datasheet.ciiva.com/14605/70068597-14605945.pdf?src-supplier=Allied+Electronics, ComponentLink8URL=https://datasheet.ciiva.com/14605/70068597-14605945.pdf?src-supplier=Allied+Electronics, ComponentLink9Description=https://datasheet.ciiva.com/43485/1676921-43485516.pdf?src-supplier=Farnell, ComponentLink9URL=https://datasheet.ciiva.com/43485/1676921-43485516.pdf?src-supplier=Farnell, ComponentLink10Description=https://datasheet.ciiva.com/46390/1676921-46390108.pdf?src-supplier=Element14, ComponentLink10URL=https://datasheet.ciiva.com/46390/1676921-46390108.pdf?src-supplier=Element14, ComponentLink11Description=https://datasheet.ciiva.com/17533/aba0000ce120-17533557.pdf?src-supplier=Avnet+Europe, ComponentLink11URL=https://datasheet.ciiva.com/17533/aba0000ce120-17533557.pdf?src-supplier=Avnet+Europe, ComponentLink12Description=https://datasheet.ciiva.com/28691/1676921-28691493.pdf?src-supplier=Element14, ComponentLink12URL=https://datasheet.ciiva.com/28691/1676921-28691493.pdf?src-supplier=Element14, Contact Plating=Tin, Diameter=12.5mm, Height=13.5mm, Height - Seated (Max)=0.531inch, Impedance=120mR, Lead Free="Lead Free", Length=14mm, Life (Hours)=5000Hour, Material=Aluminium, Mount="Surface Mount,PCB", Number of Pins=2, Packaging="Tape and Reel", Pricing 1="1=1.25000, 10=0.98900, 100=0.74180 (USD)", Radiation Hardening=No, REACH SVHC="No SVHC", Ripple Current (AC)=900mA, RoHS=Yes, Stock 1=21014, Supplier 1=Digi-Key, Termination=SMD/SMT, Voltage Rating=50V, Voltage Rating (DC)=50V, Width=900um
C14: "Polarized Capacitor (Radial)", Capacitance=100uF, Case/Package=Radial, Dielectric Material=Aluminium, Leakage Current=3uA, Manufacturer=Panasonic, Manufacturer Part Number=EEE-HC1C101XP, Max Operating Temperature=105°C, Min Operating Temperature=-40°C, Package Quantity=1, Ripple Current=81mA, Supplier Part Number 1=PCE3750CT-ND, Tolerance=20%, Voltage=16V, ComponentLink1Description=https://datasheet.ciiva.com/11783/0900766b80f32c51-11783687.pdf?src-supplier=RSComponents, ComponentLink1URL=https://datasheet.ciiva.com/11783/0900766b80f32c51-11783687.pdf?src-supplier=RSComponents, ComponentLink2Description=https://datasheet.ciiva.com/14600/70256859-14600870.pdf?src-supplier=Allied+Electronics, ComponentLink2URL=https://datasheet.ciiva.com/14600/70256859-14600870.pdf?src-supplier=Allied+Electronics, ComponentLink3Description=https://datasheet.ciiva.com/14599/70256859-14599241.pdf?src-supplier=Allied+Electronics, ComponentLink3URL=https://datasheet.ciiva.com/14599/70256859-14599241.pdf?src-supplier=Allied+Electronics, ComponentLink4Description=https://datasheet.ciiva.com/46376/370234-46376809.pdf?src-supplier=Element14, ComponentLink4URL=https://datasheet.ciiva.com/46376/370234-46376809.pdf?src-supplier=Element14, ComponentLink5Description=https://datasheet.ciiva.com/6134/370234-6134267.pdf?src-supplier=Farnell, ComponentLink5URL=https://datasheet.ciiva.com/6134/370234-6134267.pdf?src-supplier=Farnell, ComponentLink6Description=https://datasheet.ciiva.com/17535/aba0000ce109-17535947.pdf?src-supplier=Avnet+Europe, ComponentLink6URL=https://datasheet.ciiva.com/17535/aba0000ce109-17535947.pdf?src-supplier=Avnet+Europe, ComponentLink7Description=https://datasheet.ciiva.com/46386/370234-46386011.pdf?src-supplier=Element14, ComponentLink7URL=https://datasheet.ciiva.com/46386/370234-46386011.pdf?src-supplier=Element14, ComponentLink8Description=https://datasheet.ciiva.com/43455/370234-43455605.pdf?src-supplier=Farnell, ComponentLink8URL=https://datasheet.ciiva.com/43455/370234-43455605.pdf?src-supplier=Farnell, ComponentLink9Description=https://datasheet.ciiva.com/2985/aba0000ce109-2985932.pdf?src-supplier=Avnet, ComponentLink9URL=https://datasheet.ciiva.com/2985/aba0000ce109-2985932.pdf?src-supplier=Avnet, ComponentLink10Description=https://datasheet.ciiva.com/2985/aba0000ce109-2985933.pdf?src-supplier=Avnet, ComponentLink10URL=https://datasheet.ciiva.com/2985/aba0000ce109-2985933.pdf?src-supplier=Avnet, Contact Plating=Tin, Diameter=6.3mm, Height=7.7mm, Height - Seated (Max)=0.303inch, Lead Free="Lead Free", Lead Pitch=1.8mm, Length=7.7mm, Life (Hours)=3000Hour, Mount="Surface Mount,PCB", Number of Pins=2, Packaging="Tape and Reel", Pricing 1="1=0.12000 (USD)", Radiation Hardening=No, REACH SVHC="No SVHC", Ripple Current (AC)=81mA, RoHS=Yes, Stock 1=116749, Supplier 1=Digi-Key, Termination=SMD/SMT, Voltage Rating=16V, Voltage Rating (DC)=16V, Width=650um
C15: library part "CAP 0805", "CAP 0805 Decoupling", Capacitance=100nF, Case/Package=0805, Case Code (Metric)=2012, Dielectric=X7R, Dielectric Material=Ceramic, Manufacturer=KEMET, Manufacturer Part Number=C0805C104M5RACAUTO, Max Operating Temperature=125°C, Min Operating Temperature=-55°C, Ratings=AEC-Q200, Supplier Part Number 1=399-12977-1-ND, Tolerance=20%, Voltage Rating=50V, Case Code (Imperial)=0805, ComponentLink1Description=http://components.arrow.com/part/dataview/0323_00324909?src-supplier=Arrow+Europe, ComponentLink1URL=http://components.arrow.com/part/dataview/0323_00324909?src-supplier=Arrow+Europe, ComponentLink2Description=http://www.farnell.com/datasheets/2741360.pdf?src-supplier=Farnell, ComponentLink2URL=http://www.farnell.com/datasheets/2741360.pdf?src-supplier=Farnell, ComponentLink3Description=http://components.arrow.com/part/dataview/42933023S8615449N7429?src-supplier=Arrow, ComponentLink3URL=http://components.arrow.com/part/dataview/42933023S8615449N7429?src-supplier=Arrow, ComponentLink4Description=http://capacitoredge.kemet.com/capedge2/DataSheet/Datasheet-C0805C104M5RACAUTO.pdf?pn=C0805C104M5RACAUTO&src-supplier=Avnet+Asia, ComponentLink4URL=http://capacitoredge.kemet.com/capedge2/DataSheet/Datasheet-C0805C104M5RACAUTO.pdf?pn=C0805C104M5RACAUTO&src-supplier=Avnet+Asia, ComponentLink5Description=http://www.farnell.com/datasheets/2741360.pdf?src-supplier=Newark, ComponentLink5URL=http://www.farnell.com/datasheets/2741360.pdf?src-supplier=Newark, ComponentLink6Description=https://api.kemet.com/component-edge/download/datasheet/C0805C104M5RACAUTO.pdf?src-supplier=Digi-Key, ComponentLink6URL=https://api.kemet.com/component-edge/download/datasheet/C0805C104M5RACAUTO.pdf?src-supplier=Digi-Key, ComponentLink7Description=http://www.farnell.com/datasheets/2741360.pdf?src-supplier=Element14, ComponentLink7URL=http://www.farnell.com/datasheets/2741360.pdf?src-supplier=Element14, Contact Plating=Tin,Matte, Depth=1.25mm, Length=2mm, Mount="Surface Mount", Packaging="Cut Tape", Pricing 1="1=0.16000, 10=0.11500, 100=0.05410, 500=0.03794, 1000=0.03142 (USD)", REACH SVHC="No SVHC", RoHS=Yes, Stock 1=17831, Supplier 1=Digi-Key, Termination=Wraparound, Thickness=0.035inch, Voltage Rating (DC)=50V, Width=0.049inch
D1: "Schottky Diode", Average Rectified Current=4A, Forward Current=8A, Forward Voltage=570mV, Manufacturer="Vishay Semiconductors", Manufacturer Part Number=V8PAL50-M3/I, Max Forward Surge Current (Ifsm)=120A, Max Operating Temperature=150°C, Max Repetitive Reverse Voltage (Vrrm)=50V, Min Operating Temperature=-40°C, Package Quantity=14000, Peak Reverse Current=40mA, Supplier Part Number 1=V8PAL50-M3/ICT-ND, Code_JEDEC=DO-214-AA, ComponentLink1Description=https://datasheet.ciiva.com/29591/v8pal50-29591381.pdf?src-supplier=Digi-Key, ComponentLink1URL=https://datasheet.ciiva.com/29591/v8pal50-29591381.pdf?src-supplier=Digi-Key, ComponentLink2Description=https://datasheet.ciiva.com/29591/v8pal50-29591382.pdf?src-supplier=Digi-Key, ComponentLink2URL=https://datasheet.ciiva.com/29591/v8pal50-29591382.pdf?src-supplier=Digi-Key, ComponentLink3Description=https://datasheet.ciiva.com/29591/v8pal50-29591383.pdf?src-supplier=Digi-Key, ComponentLink3URL=https://datasheet.ciiva.com/29591/v8pal50-29591383.pdf?src-supplier=Digi-Key, Element Configuration=Single, Height=1mm, Length=4.35mm, Max Reverse Voltage (DC)=50V, Mount="Surface Mount", Number of Pins=2, PackageDescription="DO-214-AA/SMB; 2 C-Bend Leads; Body 5.3 x 3.6 mm, inc. leads (LxW)", PackageReference=SMB, Packaging="Tape and Reel", Peak Non-Repetitive Surge Current=120A, Pricing 1="1=0.87000, 10=0.76600, 25=0.72000, 100=0.52250, 250=0.50388, 500=0.43654, 1000=0.37152, 2500=0.34830, 5000=0.31347 (USD)", REACH SVHC=Unknown, RoHS=Yes, Stock 1=9149, Supplier 1=Digi-Key, Weight=0.001129oz, Width=2.7mm
D2: "Default Diode", Average Rectified Current=1A, Capacitance=10pF, Case/Package=SMA, Forward Voltage=1.1V, Manufacturer=Diodes, Manufacturer Part Number=S1M-13-F, Max Forward Surge Current (Ifsm)=30A, Max Operating Temperature=150°C, Max Repetitive Reverse Voltage (Vrrm)=1kV, Min Operating Temperature=-65°C, Package Quantity=5000, Peak Reverse Current=5uA, Supplier Part Number 1=S1M-FDICT-ND, Code_JEDEC=DO-214-AB, ComponentLink2Description=https://datasheet.ciiva.com/22695/1911706-22695834.pdf?src-supplier=Element14, ComponentLink2URL=https://datasheet.ciiva.com/22695/1911706-22695834.pdf?src-supplier=Element14, Current Rating=1A, Forward Current=1A, Height=2.1mm, Lead Free="Lead Free", Length=4.6mm, Max Reverse Voltage (DC)=1kV, Number of Pins=2, Output Current=1A, PackageDescription="DO-214-AB/SMC; 2 C-Bend Leads; Body 7.9 x 5.9 mm, inc. leads (LxW)", PackageReference=SMC, PackageVersion=Sep-1996, Packaging="Tape and Reel", Peak Non-Repetitive Surge Current=30A, Polarity=Standard, Pricing 1="1=0.24000, 10=0.19500, 25=0.16360, 100=0.08000, 250=0.07872, 500=0.06672, 1000=0.04636, 2500=0.04309 (USD)", Radiation Hardening=No, REACH SVHC="No SVHC", Recovery Time=1.8us, Reverse Recovery Time=3us, Reverse Voltage (DC)=1kV, RoHS=Yes, Stock 1=555751, Supplier 1=Digi-Key, Termination=SMD/SMT, Voltage Rating (DC)=1kV, Weight=0.002258oz, Width=2.92mm
F1: library part "Fuse 2", "Fuse", Current Rating=30A, Manufacturer="Keystone Electronics", Manufacturer Part Number=3557-10, Supplier Part Number 1=36-3557-10-ND, ComponentLink1Description=http://www.keyelco.com/product-pdf.cfm?p=14226&src-supplier=Digi-Key, ComponentLink1URL=http://www.keyelco.com/product-pdf.cfm?p=14226&src-supplier=Digi-Key, ComponentLink2Description=http://www.keyelco.com/product-pdf.cfm?p=14224&src-supplier=Digi-Key, ComponentLink2URL=http://www.keyelco.com/product-pdf.cfm?p=14224&src-supplier=Digi-Key, Contact Material=Brass, Contact Plating=Tin, Mount=PCB, Number of Circuits=1, Orientation=Vertical, Pricing 1="1=1.03000, 25=0.85120, 100=0.80890, 250=0.77320, 500=0.71370, 1000=0.63520, 2500=0.53190, 5000=0.51110, 10000=0.47380 (USD)", RoHS=No, Stock 1=2058, Supplier 1=Digi-Key, Termination="PC Pin"
H1 H3 H4: Color=Black, Manufacturer=Molex, Manufacturer Part Number=43650-0227, Max Operating Temperature=105°C, Min Operating Temperature=-40°C, Package Quantity=3264, Supplier Part Number 1=WM10656-ND, ComponentLink1Description=https://datasheet.ciiva.com/6840/436500227-sd-6840390.pdf?src-supplier=Digi-Key, ComponentLink1URL=https://datasheet.ciiva.com/6840/436500227-sd-6840390.pdf?src-supplier=Digi-Key, ComponentLink2Description=https://datasheet.ciiva.com/3944/28290436500227-pcb-headers-3944690.pdf?src-supplier=Arrow, ComponentLink2URL=https://datasheet.ciiva.com/3944/28290436500227-pcb-headers-3944690.pdf?src-supplier=Arrow, ComponentLink3Description=https://datasheet.ciiva.com/30077/0436500227-pcb-headers-30077244.pdf?src-supplier=Onlinecomponents.com, ComponentLink3URL=https://datasheet.ciiva.com/30077/0436500227-pcb-headers-30077244.pdf?src-supplier=Onlinecomponents.com, ComponentLink4Description=https://datasheet.ciiva.com/7920/1629867-7920765.pdf?src-supplier=Element14, ComponentLink4URL=https://datasheet.ciiva.com/7920/1629867-7920765.pdf?src-supplier=Element14, Connector Type="Header,Male Pin", Contact Material=Brass, Contact Plating=Tin,Bright, Contact Shape=Square, Depth=5.57mm, Fastening Type=Ramp, Housing Material=Thermoplastic, Insulation Material=Polymer, Length=9.65mm, Mount="Through Hole", Number of Contacts=2, Number of Ports=1, Number of Positions=2, Number of Rows=1, Number of Terminals=2, Orientation=Straight, Packaging=Tray, Pitch=3mm, Pricing 1="1=0.80000, 10=0.74800, 100=0.57340, 500=0.49860, 1000=0.41135, 5000=0.36149, 10000=0.33656 (USD)", RoHS=Yes, Stock 1=3873, Supplier 1=Digi-Key, Termination=Solder
H2: library part TERM_2P, Current Rating=45A, Manufacturer="Anderson Power", Manufacturer Part Number="1335G1, 1327G6-BK, 1327-BK", Supplier Part Number 1=2243-1335G1-ND, Voltage Rating=250V, ComponentLink1Description=https://datasheet.ciiva.com/18408/70162076-18408969.pdf?src-supplier=Allied+Electronics, ComponentLink1URL=https://datasheet.ciiva.com/18408/70162076-18408969.pdf?src-supplier=Allied+Electronics, Contact Material="Copper,Copper Alloy", Contact Plating=Tin, Gender=Female, Mount="Through Hole", Pricing 1="1=0.96000, 10=0.84200, 25=0.79200, 50=0.75900, 100=0.72600, 250=0.66000, 500=0.59400, 1000=0.52800, 2500=0.47850 (USD)", REACH SVHC="No SVHC", RoHS=Yes, Stock 1=2106, Supplier 1=Digi-Key, Termination="Through Hole"
K1: "Single-Pole Single-Throw Relay", Coil Current=37.5mA, Coil Power=900mW, Coil Resistance=640R, Coil Voltage (DC)=24V, Contact Current Rating=30A, Manufacturer="TE Connectivity P&B", Manufacturer Part Number=T9GS1L14-24, Max Operating Temperature=105°C, Min Operating Temperature=-40°C, Supplier Part Number 1=PB2395-ND, Coil Type=Non-Latching, ComponentLink1Description=https://www.te.com/commerce/DocumentDelivery/DDEController?Action=srchrtrv&amp;DocNm=T9G_1216&amp;DocType=DS&amp;DocLang=English&src-supplier=Digi-Key, ComponentLink1URL=https://www.te.com/commerce/DocumentDelivery/DDEController?Action=srchrtrv&amp;DocNm=T9G_1216&amp;DocType=DS&amp;DocLang=English&src-supplier=Digi-Key, Contact Material=Tin,Silver, Mount="Through Hole", Operate Time=15ms, Pricing 1="1=3.58000, 10=3.35300, 25=2.98000, 50=2.83100, 100=2.68200, 250=2.38400, 500=2.23500, 1000=2.08600, 5000=2.01150 (USD)", Relay Type="General Purpose", Release Time=22ms, RoHS=No, Stock 1=2574, Supplier 1=Digi-Key, Termination="PC Pin", Throw Configuration=SPST
L1: "Magnetic-Core Inductor", Case/Package=Nonstandard, Current Rating=6A, DC Resistance (DCR)=49mR, Inductance=5.6uH, Inductance Tolerance=20%, Manufacturer=Bourns, Manufacturer Part Number=SRP7050TA-5R6M, Max Operating Temperature=150°C, Min Operating Temperature=-40°C, Ratings=AEC-Q200, Saturation Current=9A, Self Resonant Frequency=20MHz, Supplier Part Number 1=SRP7050TA-5R6MCT-ND, Test Frequency=100kHz, ComponentLink1Description=http://www.farnell.com/datasheets/2360569.pdf?src-supplier=Farnell, ComponentLink1URL=http://www.farnell.com/datasheets/2360569.pdf?src-supplier=Farnell, ComponentLink2Description=http://www.farnell.com/datasheets/1955472.pdf?src-supplier=Element14, ComponentLink2URL=http://www.farnell.com/datasheets/1955472.pdf?src-supplier=Element14, ComponentLink3Description=http://www.bourns.com/docs/Product-Datasheets/SRP7050TA.pdf?src-supplier=Digi-Key, ComponentLink3URL=http://www.bourns.com/docs/Product-Datasheets/SRP7050TA.pdf?src-supplier=Digi-Key, ComponentLink4Description=https://www.bourns.com/docs/Product-Datasheets/SRP7050TA.pdf?src-supplier=Digi-Key, ComponentLink4URL=https://www.bourns.com/docs/Product-Datasheets/SRP7050TA.pdf?src-supplier=Digi-Key, Composition=Wirewound, Core Material="Carbonyl Powder", Height - Seated (Max)=0.197inch, Length=0.287inch, Mount="Surface Mount", Packaging="Cut Tape", Pricing 1="1=1.49000, 10=1.38300, 100=0.99990 (USD)", REACH SVHC="No SVHC", RMS Current (Irms)=6A, RoHS=Yes, Shielding=Shielded, Stock 1=2241, Supplier 1=Digi-Key, Tolerance=20%, Width=0.26inch
L2: "Magnetic-Core Inductor", Case/Package=SMD/SMT, Current=4A, DC Resistance (DCR)=61mR, Inductance=2.2uH, Inductance Tolerance=20%, Manufacturer=Bourns, Manufacturer Part Number=SRP4020TA-2R2M, Max Operating Temperature=150°C, Min Operating Temperature=-40°C, Package Quantity=3000, Ratings=AEC-Q200, Saturation Current=6A, Self Resonant Frequency=45MHz, Supplier Part Number 1=SRP4020TA-2R2MCT-ND, Test Frequency=100kHz, ComponentLink1Description=https://media.digikey.com/pdf/Data%20Sheets/Bourns%20PDFs/SRP4012TA_SRP4020TA_Series_Bltn.pdf?src-supplier=Digi-Key, ComponentLink1URL=https://media.digikey.com/pdf/Data%20Sheets/Bourns%20PDFs/SRP4012TA_SRP4020TA_Series_Bltn.pdf?src-supplier=Digi-Key, ComponentLink2Description=http://www.farnell.com/datasheets/2059708.pdf?src-supplier=Farnell, ComponentLink2URL=http://www.farnell.com/datasheets/2059708.pdf?src-supplier=Farnell, ComponentLink3Description=http://www.mouser.com/ds/2/54/Bourns_SRP4020TA_datasheet-368577.pdf?src-supplier=Mouser, ComponentLink3URL=http://www.mouser.com/ds/2/54/Bourns_SRP4020TA_datasheet-368577.pdf?src-supplier=Mouser, ComponentLink4Description=http://www.alliedelec.com/images/products/datasheets/bm/BOURNS/70418816.pdf?src-supplier=Allied+Electronics, ComponentLink4URL=http://www.alliedelec.com/images/products/datasheets/bm/BOURNS/70418816.pdf?src-supplier=Allied+Electronics, ComponentLink5Description=http://www.farnell.com/datasheets/2059708.pdf?src-supplier=Element14, ComponentLink5URL=http://www.farnell.com/datasheets/2059708.pdf?src-supplier=Element14, ComponentLink6Description=http://components.arrow.com/part/dataview/67522511S1057632N9116?src-supplier=Arrow, ComponentLink6URL=http://components.arrow.com/part/dataview/67522511S1057632N9116?src-supplier=Arrow, ComponentLink7Description=http://www.bourns.com/data/global/pdfs/SRP4020TA.pdf?src-supplier=Avnet, ComponentLink7URL=http://www.bourns.com/data/global/pdfs/SRP4020TA.pdf?src-supplier=Avnet, ComponentLink8Description=http://www.farnell.com/datasheets/2059708.pdf?src-supplier=Newark, ComponentLink8URL=http://www.farnell.com/datasheets/2059708.pdf?src-supplier=Newark, Composition=Wirewound, Core Material="Carbonyl Powder", Current Rating=4A, DC Current=4A, Depth=4.06mm, Height=1.8mm, Height - Seated (Max)=0.079inch, Length=4.45mm, Max DC Current=4A, Military Standard=Not, Mount="Surface Mount", Number of Pins=2, Packaging="Tape and Reel", Pricing 1="1=1.42000, 10=1.32300, 100=0.95650, 500=0.73260, 1000=0.65120 (USD)", Q Factor=10, REACH SVHC="No SVHC", RMS Current (Irms)=4A, RoHS=Yes, Shielding=Shielded, Stock 1=310, Supplier 1=Digi-Key, Termination=SMD/SMT, Tolerance=20%, Weight=0.005291oz, Width=0.16inch
Q1: "N-Channel MOSFET", Manufacturer=Nexperia, Manufacturer Part Number=2N7002NXAKR, Supplier Part Number 1=1727-8643-1-ND, PackageDescription="TO, Flat Index; 3 In-Line, Axial Leads; Body Dia. 4.6mm; Lead Dia. 0.5 mm (max)", PackageReference=E3, PackageVersion=1995/1996, Pricing 1="1=0.10000, 10=0.07600, 25=0.07240, 100=0.03190, 250=0.03064, 500=0.02506, 1000=0.01740 (USD)", RoHS=No, Stock 1=72619, Supplier 1=Digi-Key
R1: "Resistor", Case/Package=0603, Case Code (Metric)=1608, Manufacturer=Vishay, Manufacturer Part Number=CRCW0603105KFKEA, Max Operating Temperature=155°C, Max Power Dissipation=100mW, Min Operating Temperature=-55°C, Package Quantity=10, Resistance=105K, Supplier Part Number 1=541-105KHCT-ND, Temperature Coefficient=100ppm/°C, Tolerance=1%, Voltage Rating=75V, Case Code (Imperial)=0603, ComponentLink1Description=https://datasheet.ciiva.com/2466/dcrcwe3-2466299.pdf?src-supplier=Digi-Key, ComponentLink1URL=https://datasheet.ciiva.com/2466/dcrcwe3-2466299.pdf?src-supplier=Digi-Key, ComponentLink2Description=https://datasheet.ciiva.com/2466/dcrcwe3-2466300.pdf?src-supplier=Digi-Key, ComponentLink2URL=https://datasheet.ciiva.com/2466/dcrcwe3-2466300.pdf?src-supplier=Digi-Key, ComponentLink3Description=https://datasheet.ciiva.com/22708/1697337-22708060.pdf?src-supplier=Element14, ComponentLink3URL=https://datasheet.ciiva.com/22708/1697337-22708060.pdf?src-supplier=Element14, ComponentLink4Description=https://datasheet.ciiva.com/2466/dcrcwe3-2466301.pdf?src-supplier=Digi-Key, ComponentLink4URL=https://datasheet.ciiva.com/2466/dcrcwe3-2466301.pdf?src-supplier=Digi-Key, ComponentLink5Description=https://datasheet.ciiva.com/16784/70201119-16784633.pdf?src-supplier=Allied+Electronics, ComponentLink5URL=https://datasheet.ciiva.com/16784/70201119-16784633.pdf?src-supplier=Allied+Electronics, ComponentLink6Description=https://datasheet.ciiva.com/5546/dcrcwe3-109170-5546778.pdf?src-supplier=Mouser, ComponentLink6URL=https://datasheet.ciiva.com/5546/dcrcwe3-109170-5546778.pdf?src-supplier=Mouser, ComponentLink7Description=https://datasheet.ciiva.com/3256/dcrcwe3-3256935.pdf?src-supplier=Avnet, ComponentLink7URL=https://datasheet.ciiva.com/3256/dcrcwe3-3256935.pdf?src-supplier=Avnet, Composition="Thick Film", Contact Plating=Tin, Depth=0.85mm, Features="Automotive AEC-Q200", Height=0.02inch, Lead Free="Lead Free", Length=1.55mm, Military Standard=Not, Number of Pins=2, Number of Terminations=2, Packaging="Tape and Reel", Power Rating=100mW, Pricing 1="1=0.10000, 10=0.03400, 100=0.01390, 1000=0.00623, 2500=0.00540 (USD)", Radiation Hardening=No, REACH SVHC=Unknown, RoHS=Yes, Stock 1=2619, Supplier 1=Digi-Key, Termination=SMD/SMT, Voltage Rating (DC)=75V, Weight=7.1E-05oz, Width=0.85mm, Working Voltage=75V
R2: "Resistor", Case/Package=0603, Case Code (Metric)=1608, Manufacturer="Vishay Dale", Manufacturer Part Number=CRCW060349K9FKEB, Max Operating Temperature=155°C, Max Power Dissipation=100mW, Min Operating Temperature=-55°C, Package Quantity=10000, Resistance=49.9kR, Supplier Part Number 1=541-CRCW060349K9FKEBCT-ND, Temperature Coefficient=100ppm/°C, Tolerance=1%, Voltage Rating=75V, Case Code (Imperial)=0603, ComponentLink1Description=https://datasheet.ciiva.com/26821/getdatasheetpartid-90990-26821125.pdf?src-supplier=Verical, ComponentLink1URL=https://datasheet.ciiva.com/26821/getdatasheetpartid-90990-26821125.pdf?src-supplier=Verical, ComponentLink2Description=https://datasheet.ciiva.com/9003/dcrcwe3-9003497.pdf?src-supplier=Avnet, ComponentLink2URL=https://datasheet.ciiva.com/9003/dcrcwe3-9003497.pdf?src-supplier=Avnet, ComponentLink3Description=https://datasheet.ciiva.com/7792/dcrcwe3-7792299.pdf?src-supplier=Element14, ComponentLink3URL=https://datasheet.ciiva.com/7792/dcrcwe3-7792299.pdf?src-supplier=Element14, Composition="Thick Film", Contact Plating=Tin, Depth=0.85mm, Features="Automotive AEC-Q200", Height=0.02inch, Lead Free="Lead Free", Length=1.55mm, Military Standard=Not, Number of Terminations=2, Packaging="Tape and Reel", Power Rating=100mW, Pricing 1="1=0.10000, 10=0.03400, 100=0.01390, 1000=0.00623, 2500=0.00540, 5000=0.00447 (USD)", Radiation Hardening=No, REACH SVHC=Unknown, RoHS=Yes, Stock 1=19795, Supplier 1=Digi-Key, Termination=SMD/SMT, Voltage Rating (DC)=75V, Weight=7.1E-05oz, Width=0.85mm